# EAGLE board Chair_test_rev5 (EAGLE 6.5.0)
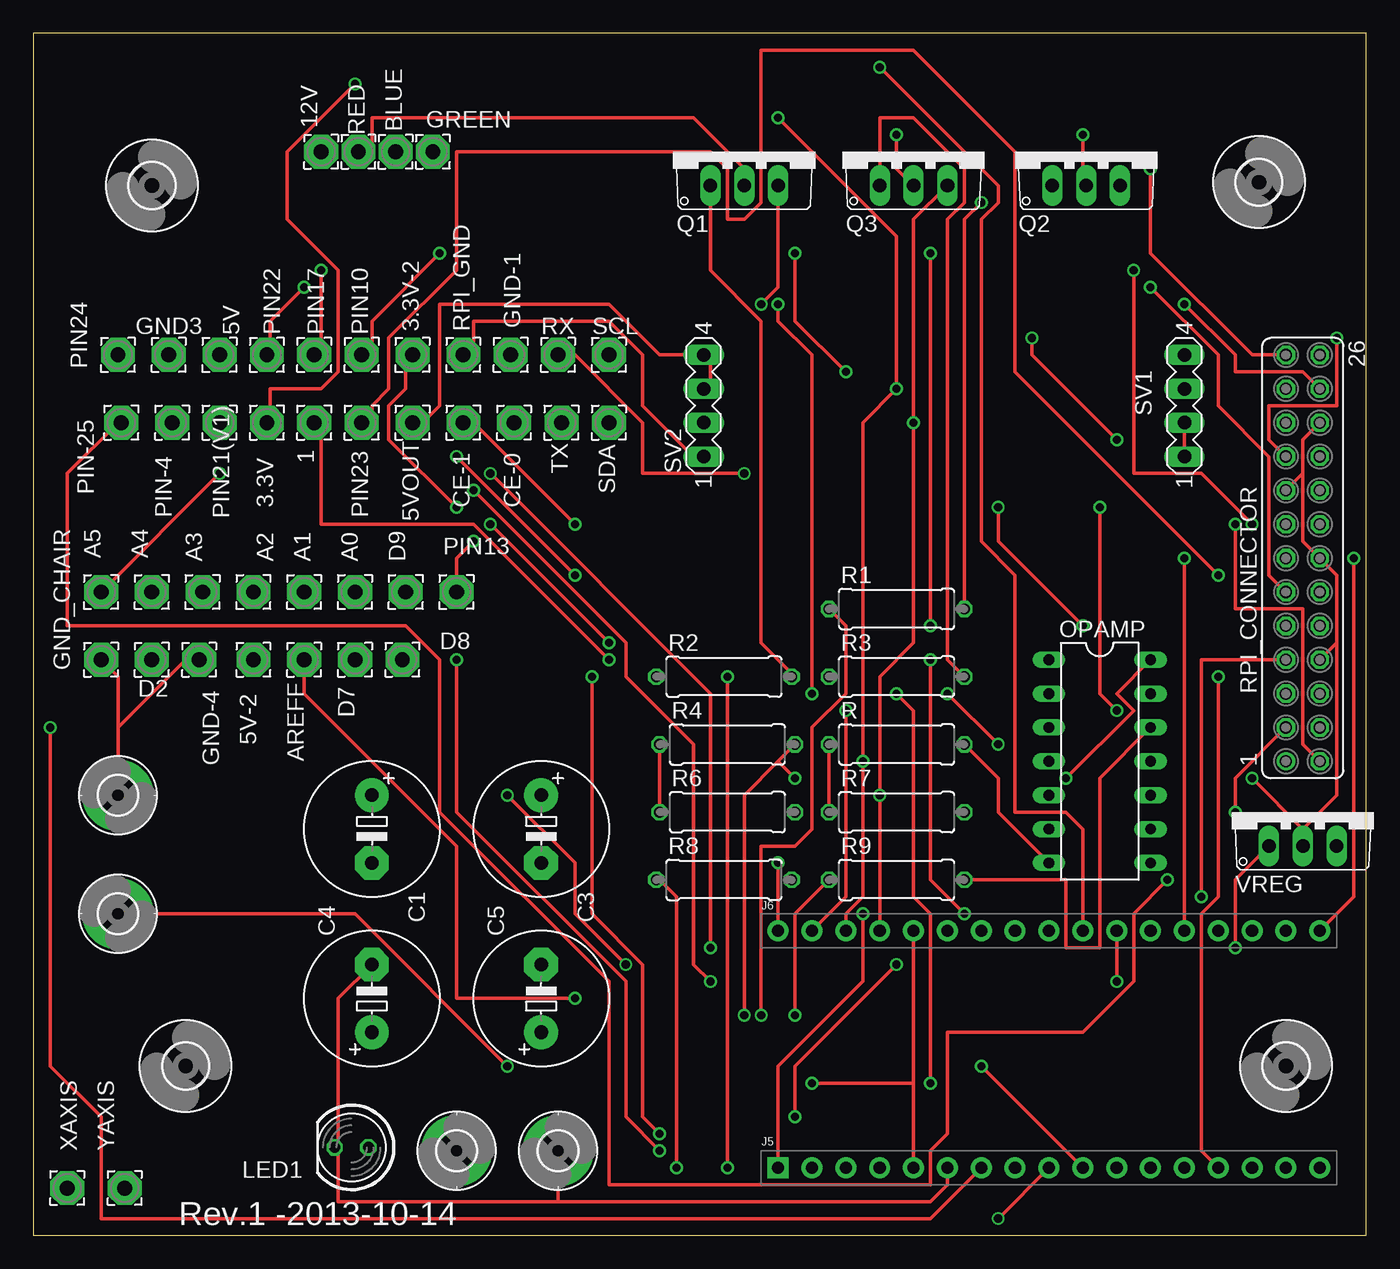
[diagram p0: board, top side]
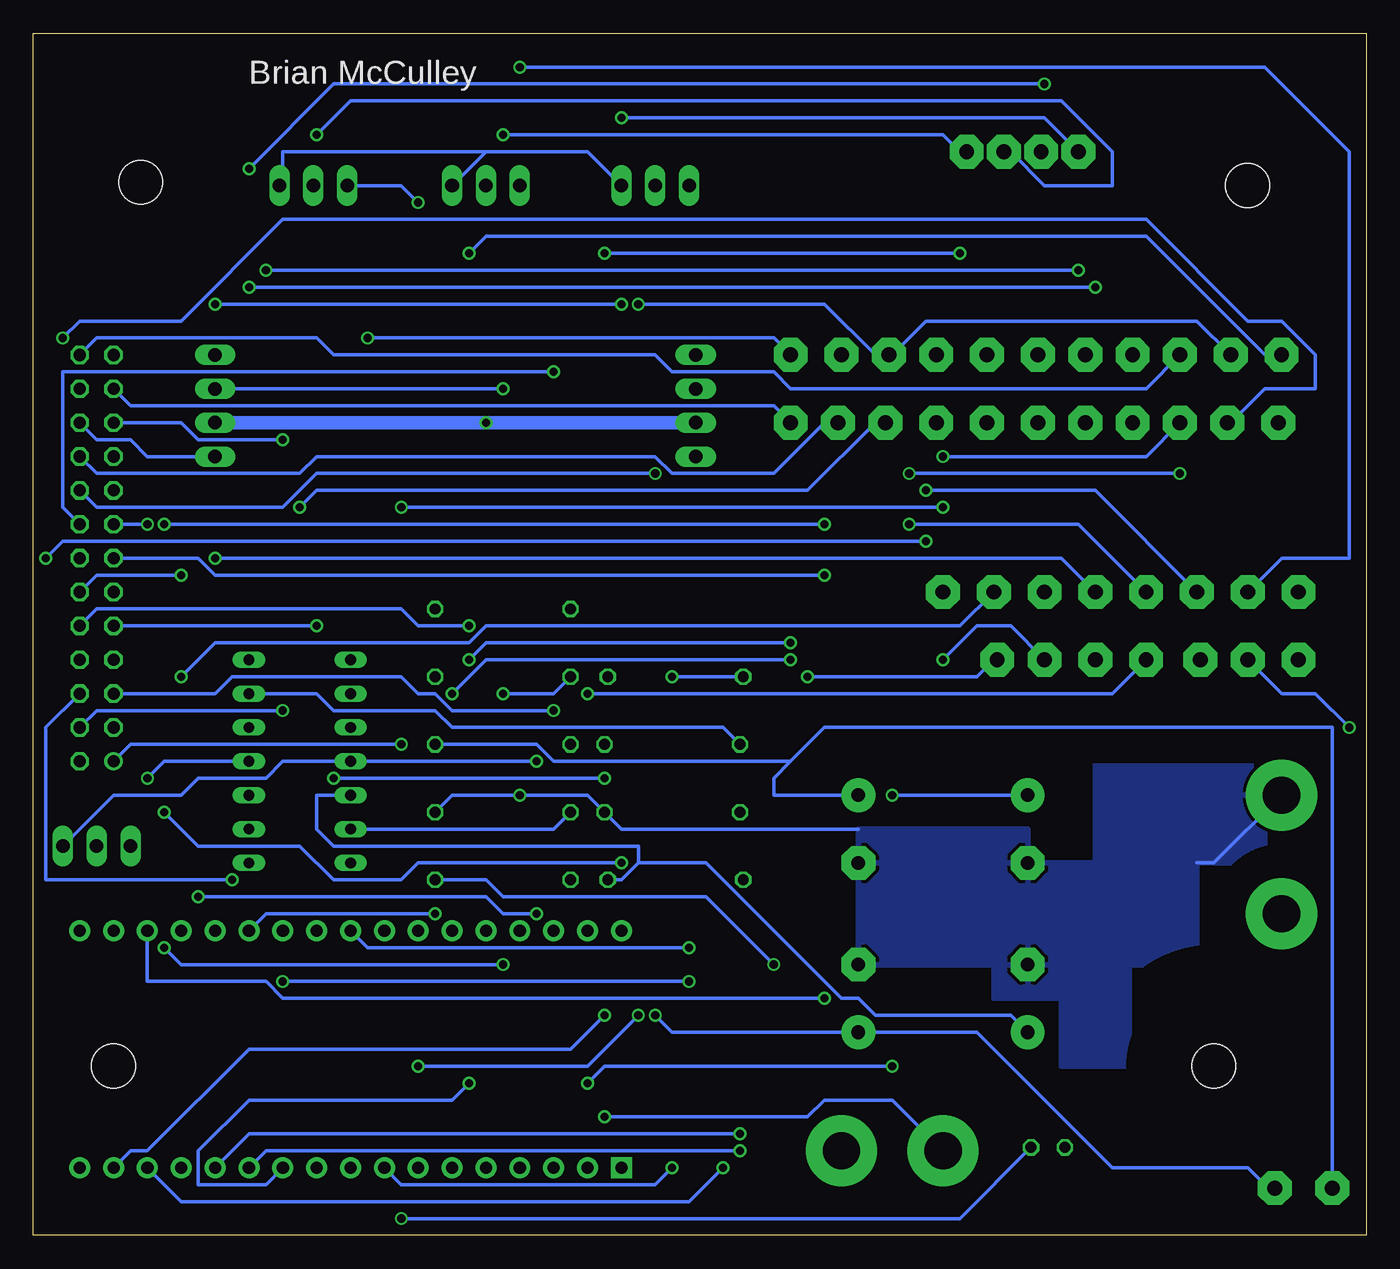
[diagram p1: board, bottom side, seen from below]

Size 100 x 90.16 mm. Coordinates in mm from the lower left corner, seen from the top.
Outline: 0,0 100,0 100,90.16 0,90.16 0,0
Copper layers (1*16): Top 0.0356mm / dielectric 1.5011mm / Bottom 0.0356mm
Design rules "oshPark": minimum track width 6mil, minimum drill 13mil, track to track 6mil, track to pad 6mil, pad to pad 6mil, via to via 6mil, smd to smd 6mil, copper to edge 15mil, drill to drill 6mil, minimum pad ring 7mil, minimum via ring 7mil, stop-mask expansion 3mil, vias tented up to drill 0mil, thermal gap 10mil
Net classes: 0 default: width 0.254 mm, drill 0.61 mm, clearance 0.203 mm
tRestrict: area 2.5,72.1 to 15.2,84.8; area 5.1,6.3 to 17.8,19; area 88.3,7 to 99.7,18.4; area 84.6,71.1 to 99.8,86.4
bRestrict: area 84.6,71.1 to 99.8,86.4; area 88.3,7 to 99.7,18.4; area 5.1,6.3 to 17.8,19; area 2.5,72.1 to 15.2,84.8

## Footprints (pad centres in the part's own frame; a part is rotated, then mirrored left to right if it is on the bottom)
2,54/1,1 = drill 1.118 pad 2.54 octagon: 1 0,0
E5-10,5 = drill 1.016 pad 2.54: + -2.54,0 | drill 1.016 pad 2.54 octagon: - 2.54,0
2,8-PAD = drill 2.8 pad 5.334: B2,8 0,0
3,3 = hole 3.3: 0,0
HEAD17-NOSS = drill 0.914 pad 1.575 square: 1 0,0 | drill 0.914 pad 1.575: 2 2.54,0; 3 5.08,0; 4 7.62,0; 5 10.16,0; 6 12.7,0; 7 15.24,0; 8 17.78,0; 9 20.32,0; 10 22.86,0; 11 25.4,0; 12 27.94,0; 13 30.48,0; 14 33.02,0; 15 35.56,0; 16 38.1,0; 17 40.64,0
HEAD17-NOSS-1 = drill 0.914 pad 1.575: 1 0,0; 2 2.54,0; 3 5.08,0; 4 7.62,0; 5 10.16,0; 6 12.7,0; 7 15.24,0; 8 17.78,0; 9 20.32,0; 10 22.86,0; 11 25.4,0; 12 27.94,0; 13 30.48,0; 14 33.02,0; 15 35.56,0; 16 38.1,0; 17 40.64,0
LED5MM = drill 0.813 octagon: A -1.27,0; K 1.27,0
DIL14 = drill 0.813 long: 1 -7.62,-3.81; 2 -5.08,-3.81; 3 -2.54,-3.81; 4 0,-3.81; 5 2.54,-3.81; 6 5.08,-3.81; 7 7.62,-3.81; 8 7.62,3.81; 9 5.08,3.81; 10 2.54,3.81; 11 0,3.81; 12 -2.54,3.81; 13 -5.08,3.81; 14 -7.62,3.81
TO220V = drill 1.016 long: 1 -2.54,-2.54; 2 0,-2.54; 3 2.54,-2.54
0309/10 = drill 0.813 octagon: 1 -5.08,0; 2 5.08,0
FE13-2 = drill 0.914: 1 -15.24,1.27 | drill 0.914 octagon: 2 -15.24,-1.27; 3 -12.7,1.27; 4 -12.7,-1.27; 5 -10.16,1.27; 6 -10.16,-1.27; 7 -7.62,1.27; 8 -7.62,-1.27; 9 -5.08,1.27; 10 -5.08,-1.27; 11 -2.54,1.27; 12 -2.54,-1.27; 13 0,1.27; 14 0,-1.27; 15 2.54,1.27; 16 2.54,-1.27; 17 5.08,1.27; 18 5.08,-1.27; 19 7.62,1.27; 20 7.62,-1.27; 21 10.16,1.27; 22 10.16,-1.27; 23 12.7,1.27; 24 12.7,-1.27; 25 15.24,1.27; 26 15.24,-1.27
MA04-1 = drill 1.016 long: 1 -3.81,0; 2 -1.27,0; 3 1.27,0; 4 3.81,0

## Placement (x,y rotation side)
1  [2,54/1,1]  21.08,60.96 0 top
3.3V  [2,54/1,1]  17.53,60.96 0 top
3.3V-2  [2,54/1,1]  28.45,66.04 0 top
5V  5v  [2,54/1,1]  13.97,66.04 0 top
5V-2  [2,54/1,1]  16.51,43.18 0 top
5VOUT  [2,54/1,1]  28.45,60.96 0 top
12V  12v  [2,54/1,1]  21.59,81.28 0 top
A0  [2,54/1,1]  24.13,48.26 0 top
A1  [2,54/1,1]  20.32,48.26 0 top
A2  [2,54/1,1]  16.51,48.26 0 top
A3  [2,54/1,1]  12.7,48.26 0 top
A4  [2,54/1,1]  8.89,48.26 0 top
A5  a5  [2,54/1,1]  5.08,48.26 0 top
AREFF  [2,54/1,1]  20.32,43.18 0 top
BLUE  [2,54/1,1]  27.18,81.28 0 top
C1  1uf  [E5-10,5]  25.4,30.48 270 top
C3  1uf  [E5-10,5]  38.1,30.48 270 top
C4  1uf  [E5-10,5]  25.4,17.78 90 top
C5  1uf  [E5-10,5]  38.1,17.78 90 top
CE-0  [2,54/1,1]  36.07,60.96 0 top
CE-1  [2,54/1,1]  32.26,60.96 0 top
D2  [2,54/1,1]  8.89,43.18 180 top
D7  [2,54/1,1]  24.13,43.18 0 top
D8  [2,54/1,1]  27.69,43.18 0 top
D9  [2,54/1,1]  27.94,48.26 0 top
GND  MOUNT-PAD-ROUND2.8  [2,8-PAD]  6.35,33.02 90 top
GND2  MOUNT-PAD-ROUND2.8  [2,8-PAD]  39.37,6.35 0 top
GND3  gnd  [2,54/1,1]  10.16,66.04 0 top
GND-1  [2,54/1,1]  35.81,66.04 0 top
GND-4  [2,54/1,1]  12.45,43.18 0 top
GND_CHAIR  [2,54/1,1]  5.08,43.18 0 top
GREEN  [2,54/1,1]  29.97,81.28 180 top
H1  MOUNT-HOLE3.3  [3,3]  8.89,78.74 0 top
H2  MOUNT-HOLE3.3  [3,3]  93.98,12.7 0 top
H3  MOUNT-HOLE3.3  [3,3]  11.43,12.7 0 top
H5  MOUNT-HOLE3.3  [3,3]  91.95,78.99 0 top
J5  HEAD17-NOSS  [HEAD17-NOSS]  55.88,5.08 0 top
J6  HEAD17-NOSS-1  [HEAD17-NOSS-1]  55.88,22.86 0 top
LED1  [LED5MM]  23.88,6.6 180 top
OPAMP  LM324N  [DIL14]  80.01,35.56 270 top
PIN10  [2,54/1,1]  24.64,66.04 0 top
PIN13  [2,54/1,1]  31.75,48.26 0 top
PIN17  [2,54/1,1]  21.08,66.04 0 top
PIN21(V1)  [2,54/1,1]  13.97,60.96 0 top
PIN22  [2,54/1,1]  17.53,66.04 0 top
PIN23  [2,54/1,1]  24.64,60.96 0 top
PIN24  pin24  [2,54/1,1]  6.35,66.04 0 top
PIN-4  [2,54/1,1]  10.41,60.96 0 top
PIN-25  [2,54/1,1]  6.6,60.96 0 top
Q1  tip120  [TO220V]  53.34,81.28 0 top
Q2  tip120  [TO220V]  78.99,81.28 0 top
Q3  tip120  [TO220V]  66.04,81.28 0 top
R  3.3k  [0309/10]  64.77,36.83 0 top
R1  2.2k  [0309/10]  64.77,46.99 0 top
R2  2.2k  [0309/10]  51.82,41.91 0 top
R3  2.2k  [0309/10]  64.77,41.91 0 top
R4  3.3k  [0309/10]  52.07,36.83 0 top
R6  2.2k  [0309/10]  52.07,31.75 0 top
R7  2.2k  [0309/10]  64.77,31.75 0 top
R8  10k  [0309/10]  51.82,26.67 0 top
R9  10k  [0309/10]  64.77,26.67 0 top
RED  [2,54/1,1]  24.38,81.28 180 top
RPI_CONNECTOR  [FE13-2]  95.25,50.8 90 top
RPI_GND  [2,54/1,1]  32.26,66.04 0 top
RST  MOUNT-PAD-ROUND2.8  [2,8-PAD]  6.35,24.13 270 top
RX  [2,54/1,1]  39.37,66.04 0 top
SCL  [2,54/1,1]  43.18,66.04 0 top
SDA  [2,54/1,1]  43.18,60.96 0 top
SV1  [MA04-1]  86.36,62.23 90 top
SV2  [MA04-1]  50.29,62.23 90 top
TX  [2,54/1,1]  39.62,60.96 0 top
VCC  MOUNT-PAD-ROUND2.8  [2,8-PAD]  31.75,6.35 0 top
VREG  7812TV  [TO220V]  95.25,31.75 0 top
XAXIS  [2,54/1,1]  2.54,3.56 0 top
YAXIS  [2,54/1,1]  6.86,3.56 0 top

## Library data of the parts
1 3.3V 3.3V-2 5V 5V-2 5VOUT 12V A0 A1-A5 AREFF BLUE CE-0 CE-1 D2 D7-D9 GND-1 GND-4 GND_CHAIR GREEN PIN10 PIN13 PIN17 PIN21(V1) PIN22-PIN24 PIN-4 PIN-25 RED RPI_GND RX SCL SDA TX XAXIS YAXIS = wirepad
C1 C3-C5 R R1-R4 R6-R9 = resistor
GND GND2 H1-H3 H5 RST VCC = holes
GND3 = wirepad; NET: gnd
J5 J6 = SmartPrj
LED1 = led
OPAMP VREG = linear
Q1-Q3 = transistor
RPI_CONNECTOR = con-lsta; OC_FARNELL: unknown; OC_NEWARK: unknown
SV1 SV2 = con-lstb; OC_FARNELL: unknown; OC_NEWARK: unknown

## Nets
3V3: J6.16
5V: 5VOUT.1 SV2.3 SV2.4
5VGND: RPI_GND.1 SV2.1
+5V: J6.6
A0: J6.14
A1: A1.1 J6.13
A2: A2.1 J6.12
A3: A3.1 J6.11
A4: A4.1 J6.10
A5: A5.1 J6.9
AREF: AREFF.1 J6.15
BLUE: J5.10 R1.1
D0/RX: J5.4
D1/TX: J5.3
D2/SDA: D2.1 J5.7
D4*: J5.9 LED1.A
D7: D7.1 J5.12
ENABLE: SV1.4
GND: C1.- C3.- C4.- C5.- GND2.B2,8 GND3.1 GND-1.1 GND-4.1 GND.B2,8 GND_CHAIR.1 J5.6 J6.4 LED1.K OPAMP.11 Q1.3 Q2.3 Q3.3 R6.2 R7.2 RPI_CONNECTOR.8 RPI_CONNECTOR.14 RPI_CONNECTOR.17 RPI_CONNECTOR.22 SV1.1 SV1.2 SV2.2 VREG.2
GREEN: J5.11 R3.1
IO8: D8.1 J5.13
IO9*: D9.1 J5.14
IO12*: J5.17
IO13*: J6.17 PIN13.1
MISO: J6.2 RPI_CONNECTOR.5
MOSI: J5.1 RPI_CONNECTOR.7
N$1: Q1.1 R2.2
N$2: Q3.1 R3.2
N$3: Q2.1 R1.2
N$4: Q1.2 RED.1
N$5: BLUE.1 Q2.2
N$6: GREEN.1 Q3.2
N$9: 3.3V-2.1 RPI_CONNECTOR.9
N$10: C1.+ OPAMP.12 R9.2
N$11: C3.+ OPAMP.7 R.2 XAXIS.1
N$12: OPAMP.6 R7.1 R.1
N$13: C5.+ OPAMP.14 R4.2 YAXIS.1
N$14: OPAMP.13 R4.1 R6.1
N$15: 1.1 RPI_CONNECTOR.1
N$16: 3.3V.1 RPI_CONNECTOR.25
N$17: RPI_CONNECTOR.23 SDA.1
N$18: RPI_CONNECTOR.21 SCL.1
N$19: PIN-4.1 RPI_CONNECTOR.19
N$21: 5V-2.1 RPI_CONNECTOR.24
N$23: RPI_CONNECTOR.20 TX.1
N$24: RPI_CONNECTOR.18 RX.1
N$25: PIN10.1 RPI_CONNECTOR.16
N$27: PIN23.1 RPI_CONNECTOR.12
N$28: PIN24.1 RPI_CONNECTOR.10
N$30: PIN-25.1 RPI_CONNECTOR.6
N$31: CE-0.1 RPI_CONNECTOR.4
N$32: CE-1.1 RPI_CONNECTOR.2
NULL: 5V.1 RPI_CONNECTOR.26
PIN17: PIN17.1 RPI_CONNECTOR.15
PIN21: PIN21(V1).1 RPI_CONNECTOR.13
PIN22: PIN22.1 RPI_CONNECTOR.11
RED: J5.8 R2.1
RESET: J5.5 J6.5 RST.B2,8
RXLED/SS: J5.2
SCK: J6.1 RPI_CONNECTOR.3
VCC: 12V.1 J6.3 OPAMP.4 SV1.3 VREG.3
VIN: VCC.B2,8 VREG.1
X: C4.+ OPAMP.5 R8.2
XAXIS: J5.15 R8.1
YAXIS: J5.16 R9.1

## Tracks (layer width: path | path; a pad name or v marks a point on that pad's centre or on a via)
5V
  Top 0.254: SV2.3 50.8,63.5 50.8,66.04 SV2.4 46.99,66.04 43.18,69.85 30.48,69.85 30.48,62.23 29.21,60.96 5VOUT.1
5VGND
  Top 0.254: SV2.1 49.53,58.42 45.72,62.23 45.72,66.04 43.18,68.58 33.02,68.58 33.02,66.04 RPI_GND.1
A1  (via drill 0.61)
  Top 0.254: v86.36,50.8 J6.13
  Bottom 0.254: v86.36,50.8 22.86,50.8 A1.1
A2  (via drill 0.61)
  Top 0.254: v69.85,24.13 67.31,26.67 v67.31,43.18 | v34.29,53.34 v43.18,44.45
  Bottom 0.254: J6.12 82.55,24.13 v69.85,24.13 | v67.31,43.18 66.04,44.45 v43.18,44.45 | v34.29,53.34 21.59,53.34 A2.1
A3  (via drill 0.61)
  Top 0.254: v81.28,19.05 J6.11 | v50.8,19.05 49.53,20.32 49.53,36.83 44.45,41.91 44.45,44.45 v33.02,55.88
  Bottom 0.254: v50.8,19.05 v81.28,19.05 | v33.02,55.88 20.32,55.88 A3.1
A4  (via drill 0.61)
  Top 0.254: J6.10 78.74,30.48 77.47,31.75 73.66,31.75 73.66,49.53 71.12,52.07 71.12,76.2 72.39,77.47 72.39,78.74 v63.5,87.63
  Bottom 0.254: v63.5,87.63 7.62,87.63 1.27,81.28 1.27,50.8 6.35,50.8 A4.1
A5  (via drill 0.61)
  Top 0.254: v50.8,21.59 50.8,40.64 v34.29,57.15 | A5.1 v13.97,57.15
  Bottom 0.254: J6.9 74.93,21.59 v50.8,21.59 | v13.97,57.15 v34.29,57.15
AREF  (via drill 0.61)
  Top 0.254: v40.64,17.78 31.75,17.78 31.75,29.21 20.32,40.64 AREFF.1
  Bottom 0.254: J6.15 91.44,19.05 82.55,19.05 81.28,17.78 v40.64,17.78
BLUE  (via drill 0.61)
  Top 0.254: R1.1 60.96,45.72 60.96,40.64 58.42,38.1 58.42,30.48 57.15,29.21 54.61,29.21 v54.61,16.51 | J5.10 v71.12,12.7
  Bottom 0.254: v54.61,16.51 58.42,12.7 v71.12,12.7
D2/SDA  (via drill 0.61)
  Top 0.254: J5.7 67.31,1.27 5.08,1.27 5.08,8.89 1.27,12.7 v1.27,38.1
  Bottom 0.254: v1.27,38.1 3.81,40.64 6.35,40.64 D2.1
D4*  (via drill 0.61)
  Top 0.254: J5.9 v72.39,1.27
  Bottom 0.254: LED1.A 30.48,1.27 v72.39,1.27
D7  (via drill 0.61)
  Top 0.254: v46.99,6.35 44.45,8.89 44.45,19.05 31.75,31.75 v31.75,43.18
  Bottom 0.254: J5.12 82.55,6.35 v46.99,6.35 | v31.75,43.18 29.21,45.72 26.67,45.72 D7.1
GND  (via drill 0.61)
  Top 0.254: SV1.2 SV1.1 | 95.25,30.48 v91.44,34.29 | 97.79,44.45 RPI_CONNECTOR.8 | 97.79,44.45 97.79,49.53 RPI_CONNECTOR.14 95.25,52.07 95.25,57.15 | 95.25,57.15 RPI_CONNECTOR.17 | 95.25,57.15 95.25,59.69 RPI_CONNECTOR.22 | 95.25,30.48 97.79,33.02 97.79,44.45 | 95.25,30.48 VREG.2 | J5.6 68.58,3.81 67.31,2.54 39.37,2.54 | GND2.B2,8 39.37,2.54 | GND_CHAIR.1 6.35,41.91 6.35,38.1 | GND.B2,8 6.35,38.1 | 6.35,38.1 11.43,43.18 GND-4.1 | 22.86,6.35 22.86,17.78 C4.- | J6.4 v63.5,33.02 63.5,41.91 66.04,44.45 v66.04,60.96 66.04,76.2 Q3.3 | v54.61,69.85 55.88,71.12 Q1.3 | 39.37,2.54 22.86,2.54 22.86,6.35 | 22.86,6.35 LED1.K
  Bottom 0.254: OPAMP.11 90.17,35.56 v91.44,34.29 | SV1.1 91.44,58.42 92.71,59.69 95.25,59.69 RPI_CONNECTOR.22 | GND3.1 12.7,68.58 33.02,68.58 35.56,66.04 GND-1.1 36.83,66.04 40.64,69.85 v54.61,69.85 | Q1.3 58.42,81.28 66.04,81.28 | Q3.3 66.04,81.28 | 66.04,81.28 81.28,81.28 81.28,78.74 Q2.3 | 38.1,30.48 55.88,30.48 R6.2 58.42,33.02 v63.5,33.02 68.58,33.02 R7.2 | GND.B2,8 11.43,27.94 12.7,27.94
  Bottom 1.016: SV1.2 v66.04,60.96 SV2.2
  pour Bottom (isolate 2.54): 38.1,27.94 38.1,20.32 12.7,20.32 12.7,27.94 7.62,27.94 7.62,35.56 20.32,35.56 20.32,27.94
  pour Bottom (rank 2): 25.4,30.48 25.4,27.94 38.1,27.94 38.1,30.48
  pour Bottom: 17.78,20.32 17.78,12.7 22.86,12.7 22.86,17.78 27.94,17.78 27.94,20.32
GREEN  (via drill 0.61)
  Top 0.254: v64.77,40.64 66.04,39.37 66.04,25.4 67.31,24.13 v67.31,11.43
  Bottom 0.254: R3.1 60.96,40.64 v64.77,40.64 | v67.31,11.43 68.58,10.16 83.82,10.16 87.63,6.35 87.63,3.81 82.55,3.81 J5.11
IO8  (via drill 0.61)
  Top 0.254: v46.99,7.62 45.72,8.89 45.72,20.32 41.91,24.13 v41.91,41.91
  Bottom 0.254: J5.13 83.82,7.62 v46.99,7.62 | v41.91,41.91 29.21,41.91 27.94,43.18 D8.1
IO9*  (via drill 0.61)
  Top 0.254: J5.14 87.63,6.35 87.63,24.13 88.9,25.4 v88.9,41.91
  Bottom 0.254: v88.9,41.91 86.36,44.45 67.31,44.45 66.04,45.72 30.48,45.72 D9.1
IO13*  (via drill 0.61)
  Top 0.254: J6.17 99.06,25.4 v99.06,50.8 | v33.02,52.07 31.75,50.8 PIN13.1
  Bottom 0.254: v99.06,50.8 97.79,52.07 v33.02,52.07
MISO  (via drill 0.61)
  Top 0.254: v60.96,39.37 60.96,25.4 J6.2
  Bottom 0.254: RPI_CONNECTOR.5 86.36,40.64 85.09,41.91 72.39,41.91 71.12,40.64 69.85,40.64 68.58,39.37 v60.96,39.37
MOSI  (via drill 0.61)
  Top 0.254: RPI_CONNECTOR.7 87.63,43.18 v87.63,25.4 | v62.23,24.13 62.23,19.05 55.88,12.7 J5.1
  Bottom 0.254: v87.63,25.4 66.04,25.4 64.77,24.13 v62.23,24.13
N$1
  Top 0.254: Q1.1 50.8,72.39 54.61,68.58 54.61,44.45 57.15,41.91 R2.2
N$2
  Top 0.254: R3.2 68.58,43.18 68.58,76.2 69.85,77.47 69.85,80.01 66.04,83.82 63.5,83.82 Q3.1
N$3  (via drill 0.61)
  Top 0.254: R1.2 69.85,76.2 v71.12,77.47
  Bottom 0.254: v71.12,77.47 72.39,78.74 Q2.1
N$4
  Top 0.254: Q1.2 53.34,80.01 49.53,83.82 25.4,83.82 25.4,81.28 RED.1
N$5  (via drill 0.61)
  Top 0.254: v78.74,82.55 78.74,78.74 Q2.2
  Bottom 0.254: v78.74,82.55 76.2,85.09 22.86,85.09 19.05,81.28 19.05,78.74 24.13,78.74 26.67,81.28 BLUE.1
N$6  (via drill 0.61)
  Top 0.254: Q3.2 64.77,80.01 v64.77,82.55
  Bottom 0.254: v64.77,82.55 31.75,82.55 30.48,81.28 GREEN.1
N$9  (via drill 0.61)
  Top 0.254: v78.74,45.72 72.39,52.07 v72.39,54.61 | v31.75,54.61 26.67,59.69 26.67,62.23 27.94,63.5 27.94,66.04 3.3V-2.1
  Bottom 0.254: v78.74,45.72 RPI_CONNECTOR.9 | v31.75,54.61 v72.39,54.61
N$10  (via drill 0.61)
  Top 0.254: R9.2 77.47,26.67 77.47,21.59 80.01,21.59 80.01,34.29 OPAMP.12 | v35.56,33.02 40.64,27.94 40.64,24.13 v44.45,20.32
  Bottom 0.254: v35.56,33.02 C1.+ | v44.45,20.32 49.53,25.4 64.77,25.4 66.04,26.67 R9.2
N$11
  Top 0.254: R.2 72.39,34.29 72.39,31.75 OPAMP.7
  Bottom 0.254: XAXIS.1 2.54,38.1 40.64,38.1 43.18,35.56 | 43.18,35.56 44.45,34.29 44.45,33.02 C3.+ | R.2 62.23,36.83 60.96,35.56 43.18,35.56
N$12
  Top 0.254: R.1 R7.1
  Bottom 0.254: OPAMP.6 60.96,30.48 R7.1
N$13  (via drill 0.61)
  Top 0.254: 55.88,35.56 53.34,33.02 v53.34,16.51 | 55.88,35.56 R4.2 | OPAMP.14 81.28,40.64 82.55,39.37 v77.47,34.29 | 55.88,35.56 v57.15,34.29
  Bottom 0.254: v53.34,16.51 52.07,15.24 C5.+ 29.21,15.24 19.05,5.08 8.89,5.08 7.62,3.81 YAXIS.1 | v57.15,34.29 v77.47,34.29
N$14
  Top 0.254: R4.1 R6.1
  Bottom 0.254: OPAMP.13 78.74,40.64 77.47,39.37 69.85,39.37 68.58,38.1 48.26,38.1 R4.1
N$15  (via drill 0.61)
  Top 0.254: v68.58,40.64 v72.39,36.83 | v43.18,43.18 33.02,53.34 21.59,53.34 21.59,60.96 1.1
  Bottom 0.254: RPI_CONNECTOR.1 92.71,36.83 v72.39,36.83 | v68.58,40.64 66.04,43.18 v43.18,43.18
N$16  (via drill 0.61)
  Top 0.254: RPI_CONNECTOR.25 91.44,66.04 83.82,73.66 v83.82,80.01 | v24.13,86.36 19.05,81.28 19.05,76.2 22.86,72.39 22.86,64.77 21.59,63.5 17.78,63.5 17.78,60.96 3.3V.1
  Bottom 0.254: v83.82,80.01 77.47,86.36 v24.13,86.36
N$17
  Bottom 0.254: RPI_CONNECTOR.23 92.71,62.23 44.45,62.23 SDA.1
N$18  (via drill 0.61)
  Top 0.254: v81.28,59.69 74.93,66.04 v74.93,67.31
  Bottom 0.254: RPI_CONNECTOR.21 88.9,60.96 87.63,59.69 v81.28,59.69 | v74.93,67.31 44.45,67.31 SCL.1
N$19  (via drill 0.61)
  Top 0.254: RPI_CONNECTOR.19 92.71,59.69 92.71,62.23 97.79,62.23 v97.79,67.31
  Bottom 0.254: v97.79,67.31 96.52,68.58 88.9,68.58 81.28,76.2 16.51,76.2 8.89,68.58 6.35,68.58 3.81,66.04 3.81,63.5 7.62,63.5 10.16,60.96 PIN-4.1
N$21  (via drill 0.61)
  Top 0.254: RPI_CONNECTOR.24 95.25,64.77 90.17,64.77 90.17,66.04 v86.36,69.85 | v55.88,69.85 55.88,68.58 58.42,66.04 v58.42,40.64
  Bottom 0.254: v55.88,69.85 v86.36,69.85 | v58.42,40.64 19.05,40.64 5V-2.1
N$23
  Bottom 0.254: RPI_CONNECTOR.20 95.25,57.15 80.01,57.15 78.74,58.42 53.34,58.42 52.07,57.15 44.45,57.15 40.64,60.96 TX.1
N$24  (via drill 0.61)
  Top 0.254: v53.34,57.15 45.72,57.15 45.72,60.96 40.64,66.04 RX.1
  Bottom 0.254: RPI_CONNECTOR.18 95.25,54.61 81.28,54.61 78.74,57.15 v53.34,57.15
N$25  (via drill 0.61)
  Top 0.254: v60.96,64.77 57.15,68.58 v57.15,73.66 | v30.48,73.66 25.4,68.58 25.4,66.04 PIN10.1
  Bottom 0.254: RPI_CONNECTOR.16 97.79,54.61 97.79,64.77 v60.96,64.77 | v30.48,73.66 v57.15,73.66
N$27  (via drill 0.61)
  Top 0.254: v88.9,49.53 73.66,64.77 73.66,81.28 66.04,88.9 54.61,88.9 54.61,77.47 53.34,76.2 52.07,76.2 52.07,80.01 50.8,81.28 31.75,81.28 31.75,72.39 26.67,67.31 26.67,63.5 25.4,62.23 25.4,60.96 PIN23.1
  Bottom 0.254: RPI_CONNECTOR.12 95.25,49.53 v88.9,49.53
N$28  (via drill 0.61)
  Top 0.254: v67.31,73.66 v67.31,45.72
  Bottom 0.254: RPI_CONNECTOR.10 95.25,46.99 72.39,46.99 71.12,45.72 v67.31,45.72 | v67.31,73.66 66.04,74.93 16.51,74.93 7.62,66.04 PIN24.1
N$30  (via drill 0.61)
  Top 0.254: v85.09,26.67 82.55,24.13 82.55,19.05 78.74,15.24 68.58,15.24 68.58,7.62 67.31,6.35 67.31,3.81 43.18,3.81 43.18,19.05 30.48,31.75 30.48,43.18 27.94,45.72 2.54,45.72 2.54,57.15 6.35,60.96 PIN-25.1
  Bottom 0.254: RPI_CONNECTOR.6 99.06,38.1 99.06,26.67 v85.09,26.67
N$31  (via drill 0.61)
  Top 0.254: v81.28,39.37 80.01,40.64 v80.01,54.61
  Bottom 0.254: RPI_CONNECTOR.4 95.25,39.37 v81.28,39.37 | v80.01,54.61 78.74,55.88 41.91,55.88 36.83,60.96 CE-0.1
N$32  (via drill 0.61)
  Top 0.254: RPI_CONNECTOR.2 95.25,36.83 95.25,46.99 90.17,46.99 v90.17,53.34 | v40.64,53.34 33.02,60.96 CE-1.1
  Bottom 0.254: v40.64,53.34 v90.17,53.34
NULL
  Bottom 0.254: RPI_CONNECTOR.26 95.25,67.31 78.74,67.31 77.47,66.04 53.34,66.04 52.07,64.77 44.45,64.77 43.18,63.5 16.51,63.5 5V.1
PIN17  (via drill 0.61)
  Top 0.254: v91.44,53.34 87.63,57.15 82.55,57.15 v82.55,72.39 | v21.59,72.39 21.59,66.04 PIN17.1
  Bottom 0.254: v91.44,53.34 RPI_CONNECTOR.15 | v21.59,72.39 v82.55,72.39
PIN21  (via drill 0.61)
  Top 0.254: v31.75,58.42 v40.64,49.53
  Bottom 0.254: RPI_CONNECTOR.13 87.63,50.8 86.36,49.53 v40.64,49.53 | v31.75,58.42 16.51,58.42 PIN21(V1).1
PIN22  (via drill 0.61)
  Top 0.254: RPI_CONNECTOR.11 92.71,49.53 92.71,58.42 88.9,62.23 88.9,66.04 v83.82,71.12 | v20.32,71.12 17.78,68.58 17.78,66.04 PIN22.1
  Bottom 0.254: v20.32,71.12 v83.82,71.12
RED  (via drill 0.61)
  Top 0.254: v52.07,5.08 v52.07,41.91
  Bottom 0.254: v52.07,41.91 R2.1 | v52.07,5.08 53.34,3.81 72.39,3.81 J5.8
RESET  (via drill 0.61)
  Top 0.254: J6.5 66.04,11.43 | 66.04,11.43 J5.5 | v58.42,11.43 66.04,11.43 | v35.56,12.7 24.13,24.13 RST.B2,8
  Bottom 0.254: v58.42,11.43 57.15,12.7 v35.56,12.7
SCK  (via drill 0.61)
  Top 0.254: RPI_CONNECTOR.3 90.17,34.29 v90.17,31.75 | J6.1 v55.88,27.94
  Bottom 0.254: v90.17,31.75 87.63,29.21 80.01,29.21 77.47,26.67 72.39,26.67 71.12,27.94 v55.88,27.94
VCC  (via drill 0.61)
  Top 0.254: J6.3 60.96,24.13 62.23,25.4 v62.23,35.56 62.23,60.96 v64.77,63.5 64.77,74.93 v55.88,83.82
  Bottom 0.254: VREG.3 93.98,33.02 88.9,33.02 87.63,34.29 82.55,34.29 81.28,35.56 OPAMP.4 v62.23,35.56 | v64.77,63.5 SV1.3 | 12V.1 24.13,83.82 v55.88,83.82
VIN  (via drill 0.61)
  Top 0.254: VREG.1 90.17,26.67 v90.17,21.59 | v64.77,20.32 57.15,12.7 v57.15,8.89
  Bottom 0.254: v90.17,21.59 88.9,20.32 v64.77,20.32 | v57.15,8.89 41.91,8.89 40.64,10.16 35.56,10.16 VCC.B2,8
X
  Bottom 0.254: 54.61,27.94 55.88,26.67 R8.2 57.15,26.67 | 54.61,27.94 54.61,29.21 77.47,29.21 78.74,30.48 78.74,33.02 OPAMP.5 | C4.+ 26.67,16.51 36.83,16.51 38.1,17.78 39.37,17.78 49.53,27.94 54.61,27.94
XAXIS  (via drill 0.61)
  Top 0.254: v48.26,5.08 48.26,25.4 46.99,26.67 R8.1
  Bottom 0.254: v48.26,5.08 50.8,2.54 88.9,2.54 J5.15
YAXIS  (via drill 0.61)
  Top 0.254: R9.1 57.15,24.13 v57.15,16.51
  Bottom 0.254: v57.15,16.51 59.69,13.97 83.82,13.97 91.44,6.35 92.71,6.35 J5.16

## Text on the board
tNames: Rev.1 -2013-10-14
bNames: Brian McCulley